# Altium PCB MASTER.PcbDoc
Units mm, origin at the board's own origin, x right, y up, seen from the top; angles counter-clockwise.
Board outline 101.16 x 95.25 mm, 2 copper layers (Top Layer, Bottom Layer); 53 components, 59 nets, 313 pads, 97 vias.
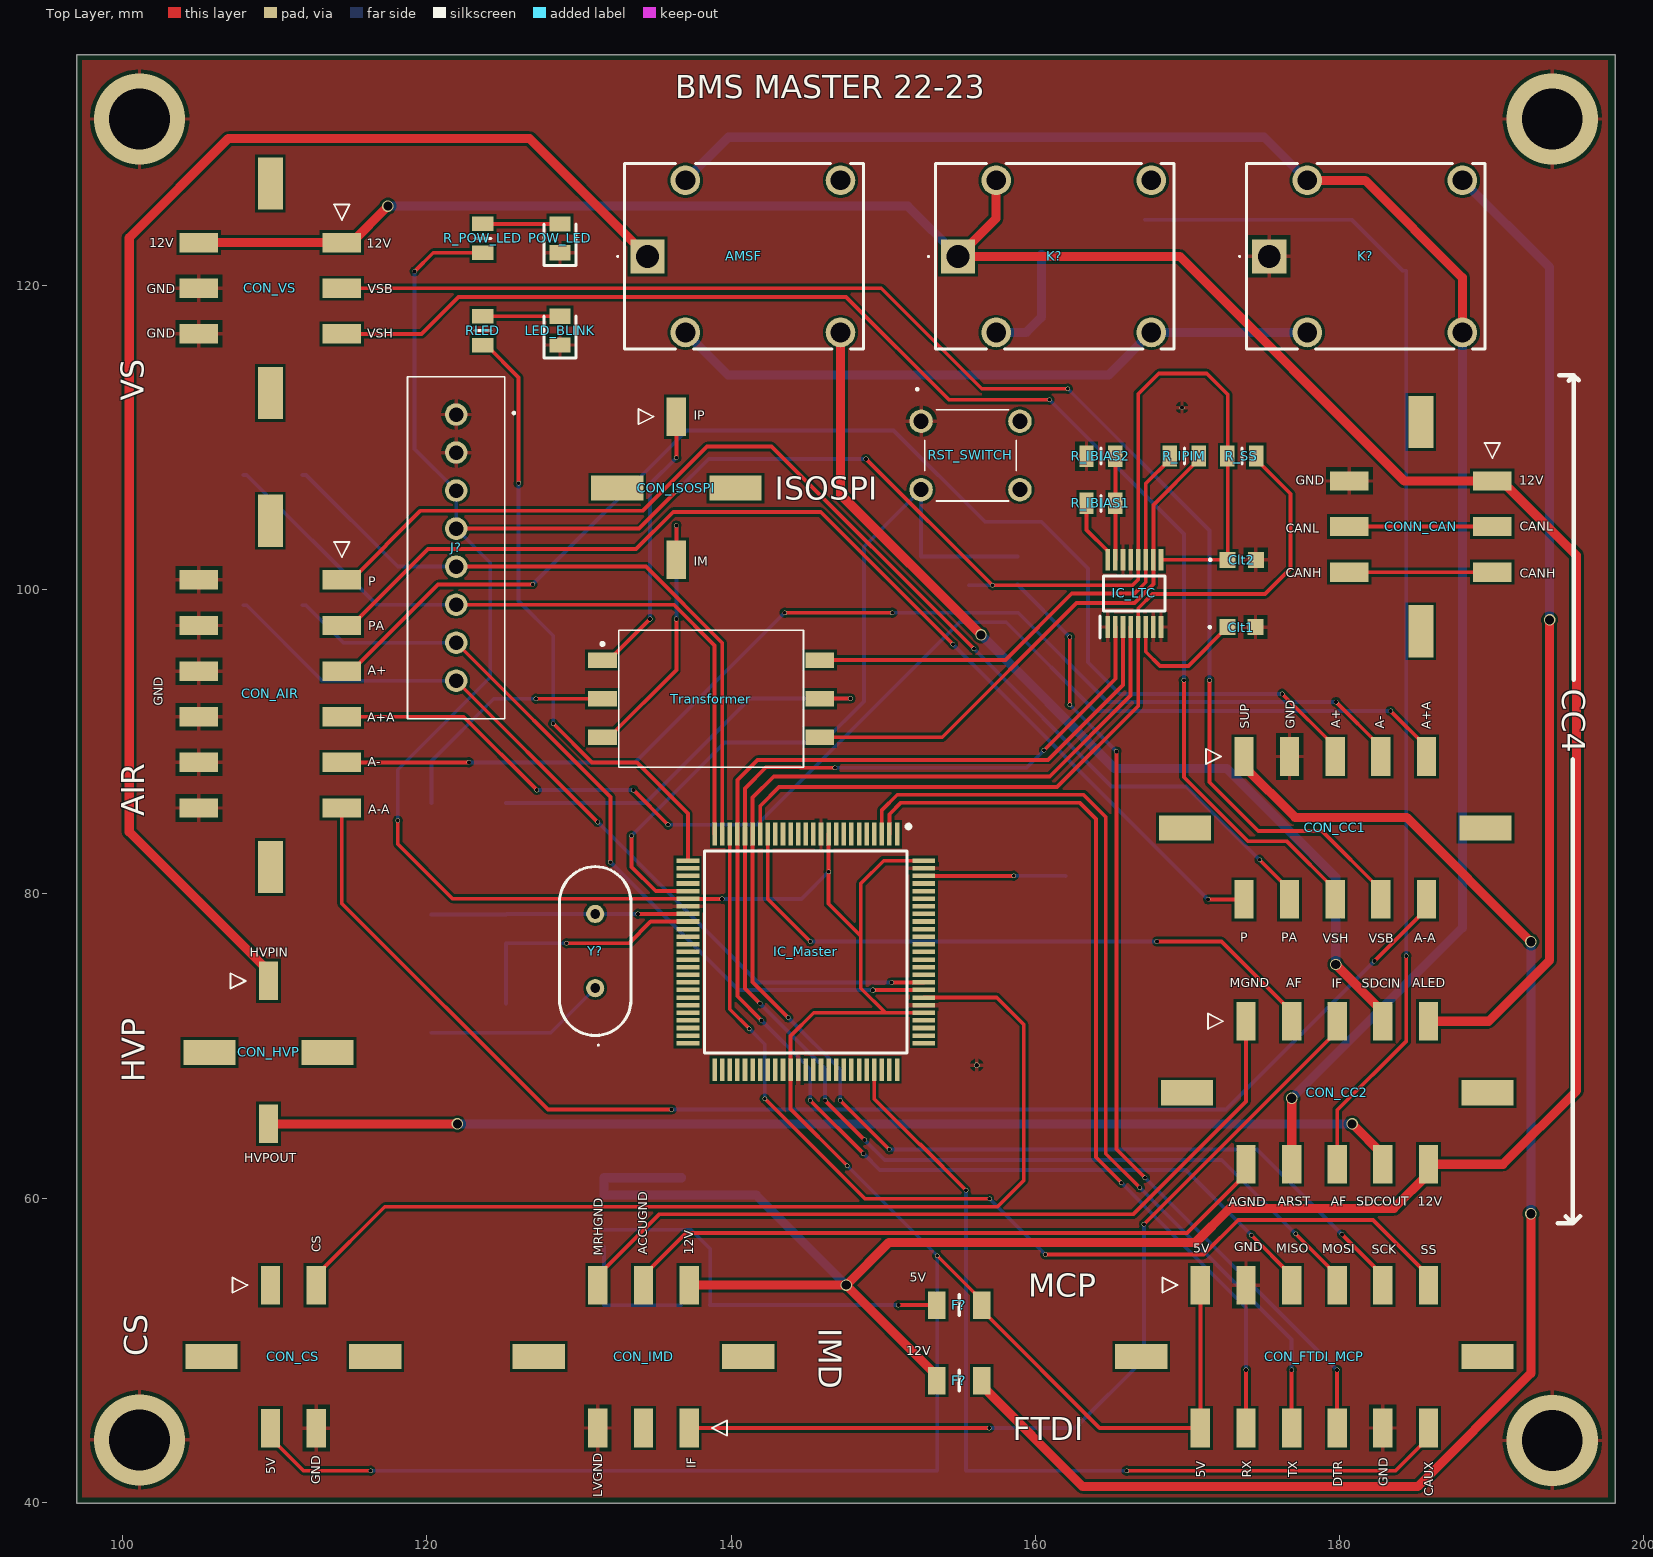
[diagram p0: Top Layer view]
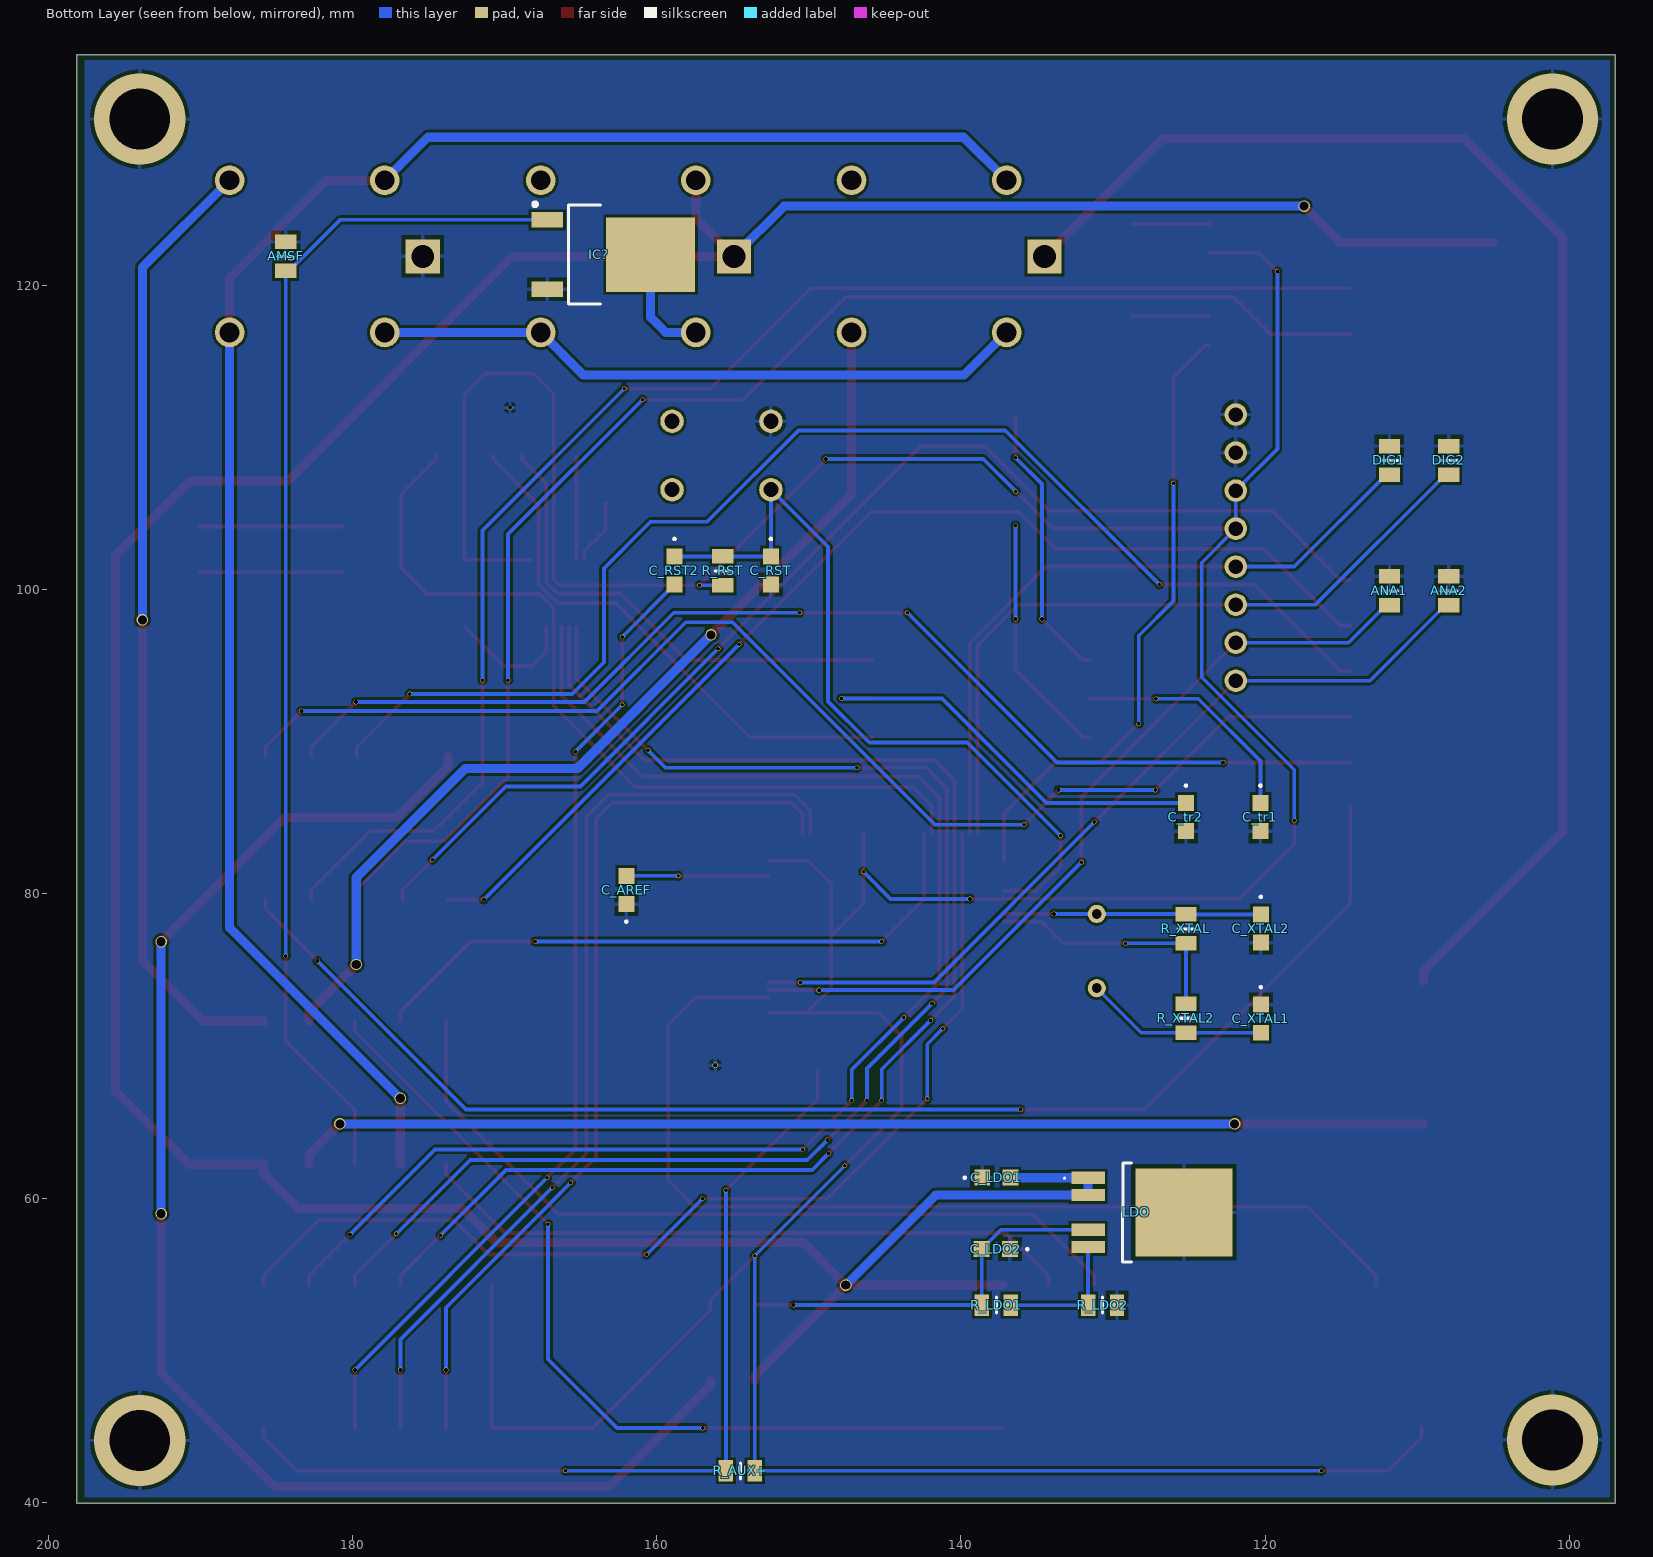
[diagram p1: Bottom Layer view, seen from below]
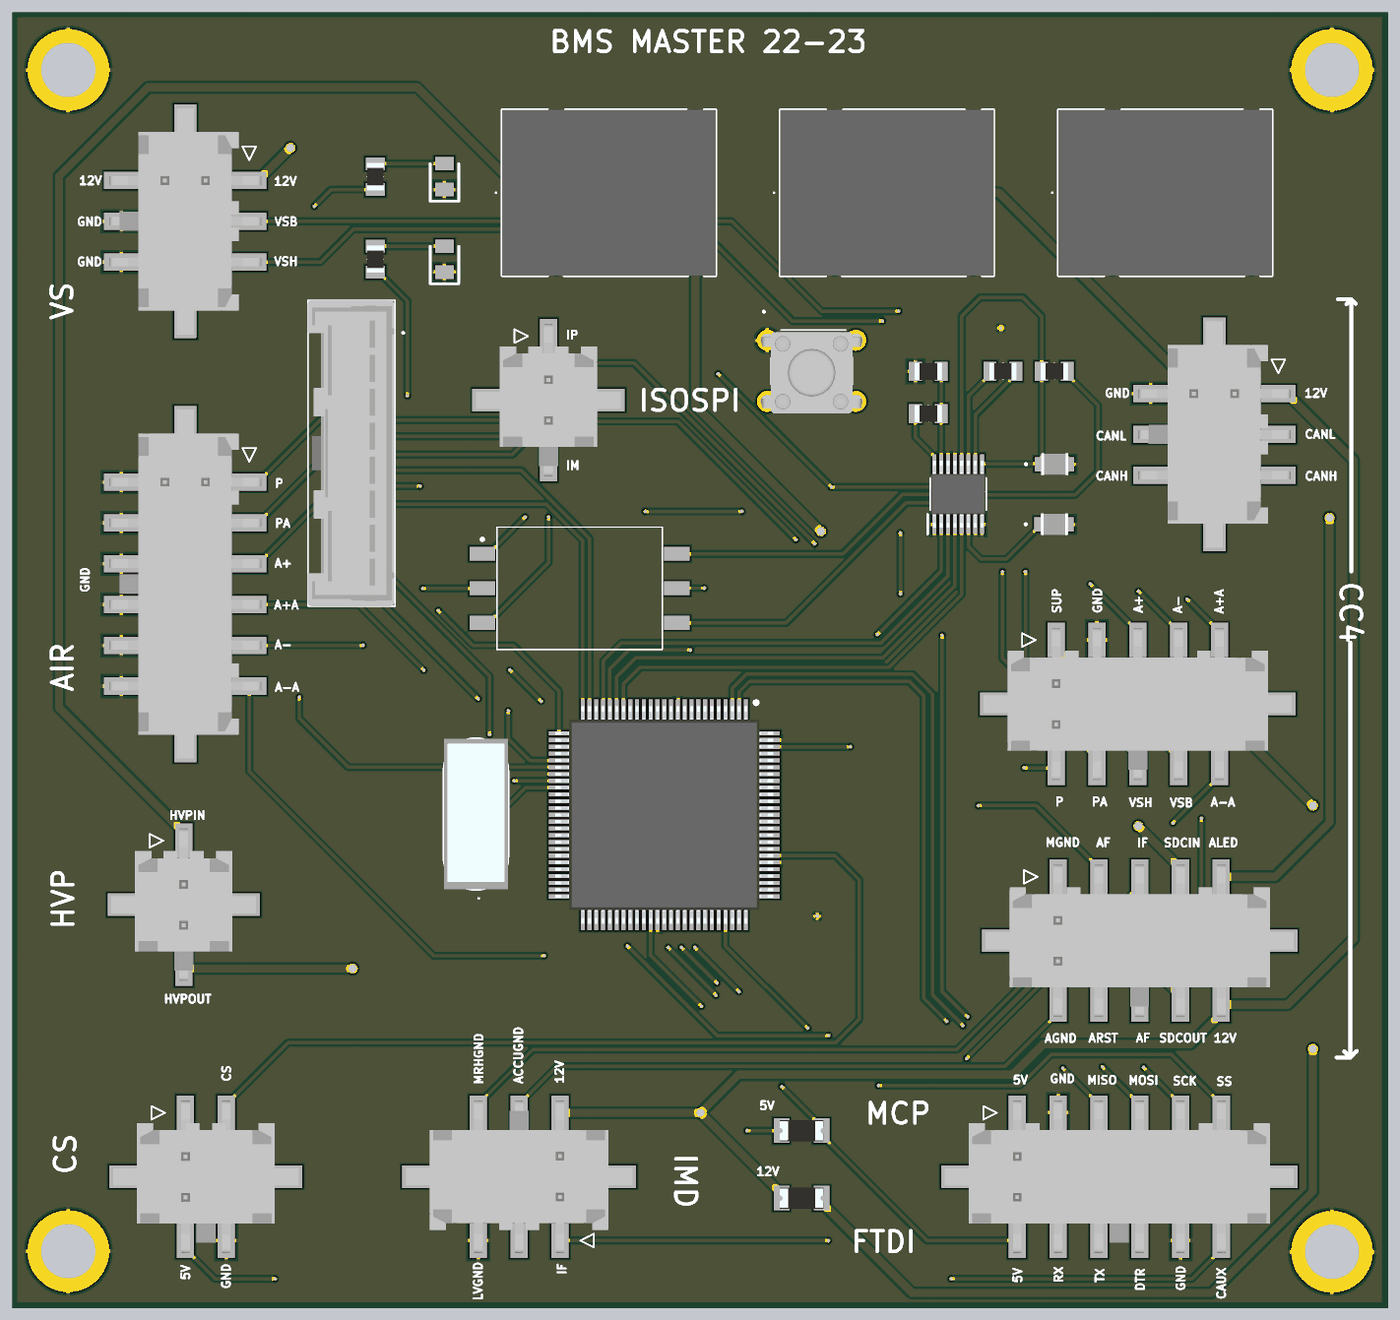
[diagram p2: 3D render of the assembled board from above, using the file's embedded part models]
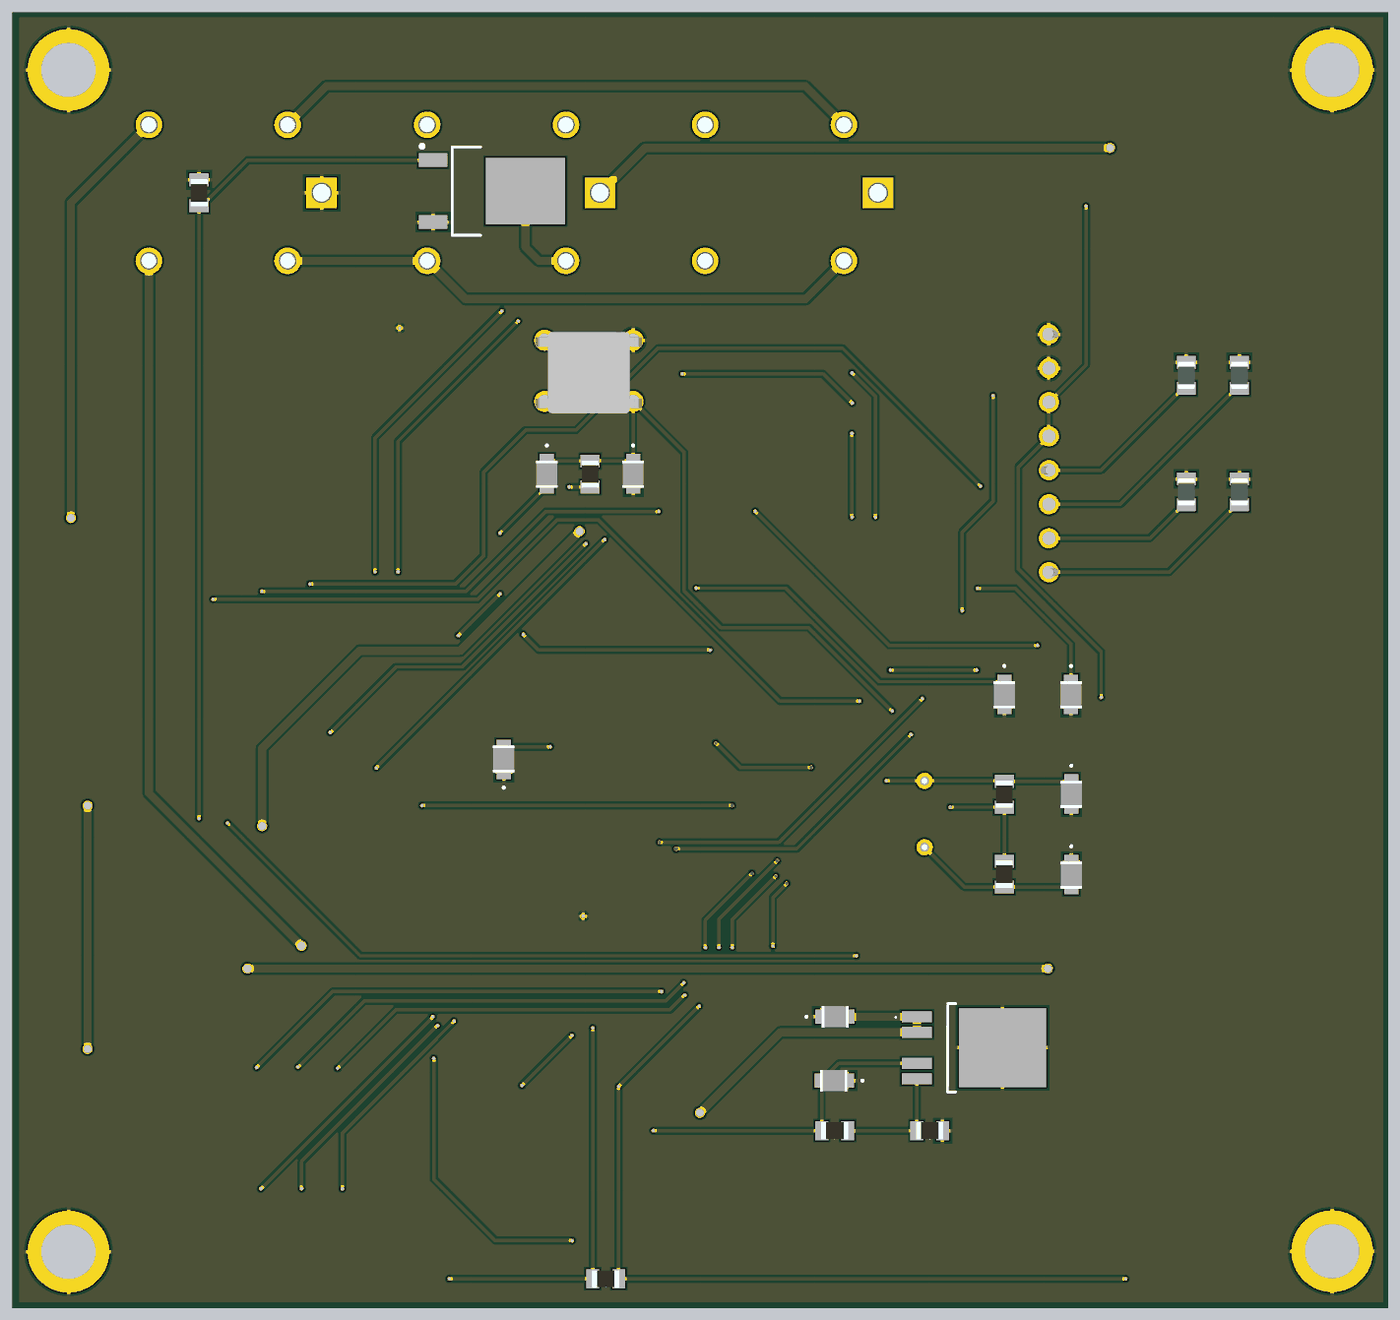
[diagram p3: 3D render of the assembled board from below, using the file's embedded part models]

## Layer stack, top to bottom
Top Solder: solder mask 0.0102, Solder Resist, Dk 3.5
Top Layer: signal copper 0.0356
Dielectric 1: dielectric 0.32, FR-4, Dk 4.8
Bottom Layer: signal copper 0.0356
Bottom Solder: solder mask 0.0102, Solder Resist, Dk 3.5

## Board outline
96.975,39.925 198.131,39.925 198.131,135.175 96.975,135.175

## Design rules (kind name [scope] priority, off if disabled: settings)
Clearance [All] p1: gap=0.17 ignorepadtopadclearanceinfootprint=FALSE
PolygonConnect [All] p1: connectstyle=Relief reliefconductorwidth=0.254 reliefentries=4 polygonreliefangle="90 Angle" airgapwidth=0.254
RoutingVias [All] p1: holewidth=0.25 width=0.3 viastyle="Through Hole" minholewidth=0.25 minwidth=0.3 maxholewidth=0.25 maxwidth=0.3
SolderMaskExpansion [All] p1: expansion=0.102 istentingtop=FALSE
Width [All] p1: maxlimit=0.6 minlimit=0.25 preferedwidth=0.25 minimp=50.000000 maximp=50.000000 favimp=50.000000
30 further rules are at their usual default settings.

## Classes and differential pairs
component class MASTER: AMSF ANA1 ANA2 C_AREF C_LDO1 C_LDO2 C_RST C_RST2 C_tr1 C_tr2 C_XTAL1 C_XTAL2 Clt1 Clt2 CON_AIR CON_CC1 CON_CC2 CON_CS CON_FTDI_MCP CON_HVP CON_IMD CON_ISOSPI CON_VS CONN_CAN DIG1 DIG2 F? IC? IC_LTC IC_Master J? K? LDO LED_BLINK POW_LED R_AUX+ R_IBIAS1 R_IBIAS2 R_IPIM R_LDO1 R_LDO2 R_POW_LED R_RST R_SS R_XTAL R_XTAL2 RLED RST_SWITCH Transformer Y?

## Components (designator, comment, footprint, x,y, rotation, side; value= is the part's Value field where it differs from the comment)
AMSF "10k" RESC2012X60N 184.398,121.92 r270 bottom
AMSF "SCA20-20-12VDC-C" SCA202012VDCC 134.493,121.92 r180 top
ANA1 "10K" RESC2012X60N 111.82,99.93 r270 bottom
ANA2 "10K" RESC2012X60N 107.92,99.93 r270 bottom
C_AREF "10nF" C2012_Commercial 161.996,80.257 r90 bottom
C_LDO1 "10nF" C2012_Commercial 137.668,61.341 r180 bottom
C_LDO2 "10nF" C2012_Commercial 137.704,56.642 r0 bottom
C_RST "22pF" C2012_Commercial 152.49,101.265 r270 bottom
C_RST2 "10uF" C2012_Commercial 158.83,101.265 r270 bottom
C_tr1 "0.01uF" C2012_Commercial 120.3,85.05 r270 bottom
C_tr2 "0.01uF" C2012_Commercial 125.2,85.05 r270 bottom
C_XTAL1 "22pF" C2012_Commercial 120.275,71.795 r270 bottom
C_XTAL2 "22pF" C2012_Commercial 120.275,77.725 r270 bottom
Clt1 "0.01uF" C2012_Commercial 173.552,97.542 r0 top
Clt2 "0.01uF" C2012_Commercial 173.577,101.967 r0 top
CON_AIR "43045-1219" 43045-12YY_181920 109.7,93.15 r90 top
CON_CC1 "43045-1019" 43045-10YY_181920 179.718,84.338 r180 top
CON_CC2 "43045-1019" 43045-10YY_181920 179.853,66.928 r180 top
CON_CS "43045-0419" 43045-04YY_181920 111.21,49.575 r180 top
CON_FTDI_MCP "43045-1219" 43045-12YY_181920 178.356,49.578 r180 top
CON_HVP "43045-0218" 43045-02YY_181920 109.585,69.58 r180 top
CON_IMD "43045-0619" 43045-06YY_181920 134.239,49.578 r0 top
CON_ISOSPI "43045-0218" 43045-02YY_181920 136.398,106.681 r180 top
CON_VS "43045-0619" 43045-06YY_181920 109.7,119.825 r90 top
CONN_CAN "43045-0619" 43045-06YY_181920 185.349,104.153 r90 top
DIG1 "10K" RESC2012X60N 111.82,108.5 r270 bottom
DIG2 "10K" RESC2012X60N 107.92,108.5 r270 bottom
F? "NANOSMDC020F-2" NANOSMDC016F2 155,52.96 r0 top
F? "NANOSMDC020F-2" NANOSMDC016F2 155,48 r0 top
IC? "STD10NF10T4" TO228P972X240-3N 162.849,122.043 r180 bottom
IC_LTC "LTC6820IMS#PBF" SOP50P490X110-16N 166.517,99.764 r90 top
IC_Master "ATMEGA2560-16AU" QFP50P1600X1600X120-100N 144.91,76.184 r270 top
J? "2132415-8" 21324158 121.92,102.77 r90 top
K? "SCA20-20-12VDC-C" SCA202012VDCC 175.384,121.92 r180 top
K? "SCA20-20-12VDC-C" SCA202012VDCC 154.926,121.92 r180 top
LDO "TLF1963TEATMA1" TLF1963TEATMA1 127.381,59.055 r270 bottom
LED_BLINK "SML-LXT0805IW-TR" LEDC2012X80N 128.751,117.039 r90 top
POW_LED "SML-LXT0805IW-TR" LEDC2012X80N 128.751,123.106 r90 top
R_AUX+ "10k" RESC2012X60N 154.5,42.07 r180 bottom
R_IBIAS1 "2.8K" RESC2012X60N 164.317,105.682 r0 top
R_IBIAS2 "1.2K" RESC2012X60N 164.317,108.782 r0 top
R_IPIM "1K" RESC2012X60N 169.802,108.792 r0 top
R_LDO1 "3.3K" RESC2012X60N 137.668,52.959 r0 bottom
R_LDO2 "10K" RESC2012X60N 130.683,52.959 r0 bottom
R_POW_LED "1K" RESC2012X60N 123.671,123.106 r90 top
R_RST "10k" RESC2012X60N 155.65,101.241 r270 bottom
R_SS "10K" RESC2012X60N 173.577,108.792 r180 top
R_XTAL "10M" RESC2012X60N 125.2,77.7 r270 bottom
R_XTAL2 "27" RESC2012X60N 125.2,71.825 r90 bottom
RLED "1K" RESC2012X60N 123.671,117.039 r90 top
RST_SWITCH "1825910-3" 18259103 152.49,111.08 r90 top
Transformer "HM2113ZNL" HM2113ZNL 138.684,92.837 r270 top
Y? "LFXTAL003169" LFXTAL003169 131.064,73.801 r90 top

## Footprints (in the part's own frame and the unit in brackets; to place one, negate y for a bottom-side part, rotate by r counter-clockwise, add the part's x,y. Pads: shape width x height; smd on the part's side, far side on the other; paste and mask are expansions set on the pad)
43045-02YY_181920 [mm]
  rect 1.27x2.54 smd: 1(0,-4.7) 2(0,4.7)
  rect 3.43x1.65 smd: 3(3.885,0) 4(-3.885,0)
  silkscreen extent 1.5,-5.2 2.5,-4.2, body extent -5.33,-5.6 5.33,5.6, height 9.96
43045-04YY_181920 [mm]
  rect 1.27x2.54 smd: 1(1.5,-4.7) 2(-1.5,-4.7) 3(1.5,4.7) 4(-1.5,4.7)
  rect 3.43x1.65 smd: 5(5.385,0) 6(-5.385,0)
  silkscreen extent 3,-5.2 4,-4.2, body extent -6.83,-5.6 6.83,5.6, height 9.96
43045-06YY_181920 [mm]
  rect 1.27x2.54 smd: 1(3,-4.7) 2(0,-4.7) 3(-3,-4.7) 4(3,4.7) 5(0,4.7) 6(-3,4.7)
  rect 3.43x1.65 smd: 7(6.885,0) 8(-6.885,0)
  silkscreen extent 4.5,-5.2 5.5,-4.2, body extent -8.32,-5.6 8.32,5.6, height 9.96
43045-10YY_181920 [mm]
  rect 1.27x2.54 smd: 1(6,-4.7) 2(3,-4.7) 3(0,-4.7) 4(-3,-4.7) 5(-6,-4.7) 6(6,4.7) 7(3,4.7) 8(0,4.7) 9(-3,4.7) 10(-6,4.7)
  rect 3.43x1.65 smd: 11(9.885,0) 12(-9.885,0)
  silkscreen extent 7.5,-5.2 8.5,-4.2, body extent -11.32,-5.6 11.32,5.6, height 9.96
43045-12YY_181920 [mm]
  rect 1.27x2.54 smd: 1(7.5,-4.7) 2(4.5,-4.7) 3(1.5,-4.7) 4(-1.5,-4.7) 5(-4.5,-4.7) 6(-7.5,-4.7) 7(7.5,4.7) 8(4.5,4.7) 9(1.5,4.7) 10(-1.5,4.7) 11(-4.5,4.7) 12(-7.5,4.7)
  rect 3.43x1.65 smd: 13(11.385,0) 14(-11.385,0)
  silkscreen extent 9,-5.2 10,-4.2, body extent -12.83,-5.6 12.83,5.6, height 9.95
18259103 [mm]
  round 1.54 hole 0.99: 1(0,0) 2(0,-6.5) 3(-4.5,0) 4(-4.5,-6.5)
  silkscreen extent -5.25,-6.25 2.15,0.3, body extent -5.39,-7.15 0.61,0.65, height 3.32
21324158 [mm]
  round 1.478 hole 0.95: 1(8.75,0) 2(6.25,0) 3(3.75,0) 4(1.25,0) 5(-1.25,0) 6(-3.75,0) 7(-6.25,0) 8(-8.75,0)
  silkscreen extent -11.25,-3.85 11.25,3.2, body extent -11.25,-3.16 11.25,3.24, height 8.82
C2012_Commercial [mm]
  rect 1.05x1.05 smd: 1(-0.925,0) 2(0.925,0)
  silkscreen extent -2.12,-0.05 -2.03,0.05, body extent -0.96,-0.8 1.04,0.8, height 1.25
HM2113ZNL [mm]
  rect 1.02x1.89 smd: 1(-2.54,-7.145) 2(0,-7.145) 3(2.54,-7.145) 4(2.54,7.145) 5(0,7.145) 6(-2.54,7.145)
  silkscreen extent -4.5,-7.24 4.5,6.08
LEDC2012X80N [mm]
  rect 1x1.4 smd: 1(-0.95,0) 2(0.95,0)
  silkscreen extent -1.8,-1.05 0.95,1.05
LFXTAL003169 [mm]
  round 1.192 hole 0.65: 1(0,0) 2(4.88,0)
  silkscreen extent -3.8,-2.35 7.99,2.35, body extent -3.09,-2.35 7.97,2.35, height 4.1
NANOSMDC016F2 [mm]
  rect 1.16x1.81 smd: 1(-1.475,0) 2(1.475,0)
  silkscreen extent 0,-0.69 0,0.69, body extent -1.6,-0.79 1.6,0.79, height 0.82
QFP50P1600X1600X120-100N [mm]
  rect 1.5x0.3 smd: 1(-7.75,6) 2(-7.75,5.5) 3(-7.75,5) 4(-7.75,4.5) 5(-7.75,4) 6(-7.75,3.5) 7(-7.75,3) 8(-7.75,2.5) 9(-7.75,2) 10(-7.75,1.5) 11(-7.75,1) 12(-7.75,0.5) 13(-7.75,0) 14(-7.75,-0.5) 15(-7.75,-1) 16(-7.75,-1.5) 17(-7.75,-2) 18(-7.75,-2.5) 19(-7.75,-3) 20(-7.75,-3.5) 21(-7.75,-4) 22(-7.75,-4.5) 23(-7.75,-5) 24(-7.75,-5.5) 25(-7.75,-6) 51(7.75,-6) 52(7.75,-5.5) 53(7.75,-5) 54(7.75,-4.5) 55(7.75,-4) 56(7.75,-3.5) 57(7.75,-3) 58(7.75,-2.5) 59(7.75,-2) 60(7.75,-1.5) 61(7.75,-1) 62(7.75,-0.5) 63(7.75,0) 64(7.75,0.5) 65(7.75,1) 66(7.75,1.5) 67(7.75,2) 68(7.75,2.5) 69(7.75,3) 70(7.75,3.5) 71(7.75,4) 72(7.75,4.5) 73(7.75,5) 74(7.75,5.5) 75(7.75,6)
  rect 0.3x1.5 smd: 26(-6,-7.75) 27(-5.5,-7.75) 28(-5,-7.75) 29(-4.5,-7.75) 30(-4,-7.75) 31(-3.5,-7.75) 32(-3,-7.75) 33(-2.5,-7.75) 34(-2,-7.75) 35(-1.5,-7.75) 36(-1,-7.75) 37(-0.5,-7.75) 38(0,-7.75) 39(0.5,-7.75) 40(1,-7.75) 41(1.5,-7.75) 42(2,-7.75) 43(2.5,-7.75) 44(3,-7.75) 45(3.5,-7.75) 46(4,-7.75) 47(4.5,-7.75) 48(5,-7.75) 49(5.5,-7.75) 50(6,-7.75) 76(6,7.75) 77(5.5,7.75) 78(5,7.75) 79(4.5,7.75) 80(4,7.75) 81(3.5,7.75) 82(3,7.75) 83(2.5,7.75) 84(2,7.75) 85(1.5,7.75) 86(1,7.75) 87(0.5,7.75) 88(0,7.75) 89(-0.5,7.75) 90(-1,7.75) 91(-1.5,7.75) 92(-2,7.75) 93(-2.5,7.75) 94(-3,7.75) 95(-3.5,7.75) 96(-4,7.75) 97(-4.5,7.75) 98(-5,7.75) 99(-5.5,7.75) 100(-6,7.75)
  silkscreen extent -8.37,-6.65 6.65,6.88, body extent -8,-8 8,8, height 1.2
RESC2012X60N [mm]
  rect 0.95x1.4 smd: 1(-0.95,0) 2(0.95,0)
  silkscreen extent 0,-0.53 0,0.53, body extent -1,-0.63 1,0.63, height 0.6
SCA202012VDCC [mm]
  rect 2.25x2.25 hole 1.5: 1(0,0)
  round 1.95 hole 1.3: 2(-2.5,5) 3(-12.7,5) 4(-12.7,-5) 5(-2.5,-5)
  silkscreen extent -14.2,-6.1 2,6.1, body extent -14.2,-6.1 1.5,6.1, height 13.8
SOP50P490X110-16N [mm]
  rect 1.425x0.3 smd: 1(-2.212,1.75) 2(-2.212,1.25) 3(-2.212,0.75) 4(-2.212,0.25) 5(-2.212,-0.25) 6(-2.212,-0.75) 7(-2.212,-1.25) 8(-2.212,-1.75) 9(2.212,-1.75) 10(2.212,-1.25) 11(2.212,-0.75) 12(2.212,-0.25) 13(2.212,0.25) 14(2.212,0.75) 15(2.212,1.25) 16(2.212,1.75)
  silkscreen extent -2.93,-2.02 1.15,2.25, body extent -2.45,-2.02 2.45,2.02, height 1.1
TLF1963TEATMA1 [mm]
  rect 0.8x2.2 smd: 1(-2.28,-4.25) 2(-1.14,-4.25) 4(1.14,-4.25) 5(2.28,-4.25)
  rect 5.8x6.4 smd: 3(0,2.05)
  silkscreen extent -3.25,-5.85 3.25,-1.4
TO228P972X240-3N [mm]
  rect 2.1x1 smd: 1(-4.35,2.28) 3(-4.35,-2.28)
  rect 5.85x4.9 smd: 4(2.45,0)
  silkscreen extent -5.28,-3.25 -0.85,3.42

## Part data
AMSF R_AUX+ R_IBIAS1 R_IBIAS2 R_IPIM R_LDO1 R_LDO2 R_POW_LED R_RST R_SS R_XTAL R_XTAL2 RLED: library part RC0805JR-0710KL, "Resistor", Manufacturer_Name=KEMET, Mouser Part Number=603-RC0805JR-0710KL, Arrow Part Number=RC0805JR-0710KL, Arrow Price/Stock=https://www.arrow.com/en/products/rc0805jr-0710kl/yageo, Height=0.6mm, Manufacturer_Part_Number=RC0805JR-0710KL, Mouser Price/Stock=https://www.mouser.co.uk/ProductDetail/YAGEO/RC0805JR-0710KL?qs=ZFGQJeMQzF5q%2Fp77vM%2FrVQ%3D%3D
  AMSF R_SS: Datasheet Link=http://www.yageo.com/documents/recent/PYu-RC_Group_51_RoHS_L_10.pdf
  R_AUX+ R_IBIAS1 R_IBIAS2 R_IPIM R_LDO1 R_LDO2 R_POW_LED R_RST R_XTAL R_XTAL2 RLED: Datasheet Link=https://datasheet.datasheetarchive.com/originals/distributors/Datasheets_SAMA/902f9e387b938f871d31120f5fc1d65e.pdf
AMSF K? K?: "Relay or Contactor", Manufacturer_Name=LEONE, Datasheet Link=https://www.kuraelectronics.com/new-pdf/SCA%2020.pdf, Height=13.7mm, Manufacturer_Part_Number=SCA20-20-12VDC-C
ANA1 ANA2 DIG1 DIG2: library part RC0805JR-0710KL, "Resistor", Manufacturer_Name=YAGEO, Mouser Part Number=603-RC0805JR-0710KL, Arrow Part Number=RC0805JR-0710KL, Arrow Price/Stock=https://www.arrow.com/en/products/rc0805jr-0710kl/yageo?region=nac, Datasheet Link=https://componentsearchengine.com/Datasheets/2/RC0805JR-0710KL.pdf, Height=0.6mm, Manufacturer_Part_Number=RC0805JR-0710KL, Mouser Price/Stock=https://www.mouser.co.uk/ProductDetail/YAGEO/RC0805JR-0710KL?qs=ZFGQJeMQzF5q%2Fp77vM%2FrVQ%3D%3D
C_AREF C_LDO1 C_LDO2 C_RST C_RST2 C_tr1 C_tr2 C_XTAL1 C_XTAL2 Clt1 Clt2: library part C2012C0G1E333J125AA, "Capacitor", Manufacturer_Name=TDK, Mouser Part Number=810-C2012C0G1E333J, Arrow Part Number=C2012C0G1E333J125AA, Arrow Price/Stock=https://www.arrow.com/en/products/c2012c0g1e333j125aa/tdk, Datasheet Link=https://product.tdk.com/system/files/dam/doc/product/capacitor/ceramic/mlcc/catalog/mlcc_commercial_general_en.pdf, Height=0.75mm, Manufacturer_Part_Number=C2012C0G1E333J125AA, Mouser Price/Stock=https://www.mouser.co.uk/ProductDetail/TDK/C2012C0G1E333J125AA?qs=NRhsANhppD9YN6415mAquQ%3D%3D
CON_AIR CON_FTDI_MCP: "Connector", Manufacturer_Name=Molex, Mouser Part Number=538-43045-1219, Datasheet Link=https://www.molex.com/pdm_docs/sd/430450218_sd.pdf, Height=9.91mm, Manufacturer_Part_Number=43045-1219, Mouser Price/Stock=https://www.mouser.co.uk/ProductDetail/Molex/43045-1219?qs=359VwiUTsp3iCU2NVYxNVg%3D%3D
CON_CC1 CON_CC2: "Connector", Manufacturer_Name=Molex, Mouser Part Number=538-43045-1019, Arrow Part Number=43045-1019, Arrow Price/Stock=https://www.arrow.com/en/products/43045-1019/molex?region=nac, Datasheet Link=https://www.molex.com/pdm_docs/sd/430450218_sd.pdf, Height=9.91mm, Manufacturer_Part_Number=43045-1019, Mouser Price/Stock=https://www.mouser.co.uk/ProductDetail/Molex/43045-1019?qs=OWQJ9aScCGICje0BO%252BCnwQ%3D%3D
CON_CS: "Connector", Manufacturer_Name=Molex, Mouser Part Number=538-43045-0419, Datasheet Link=https://www.molex.com/pdm_docs/sd/430450218_sd.pdf, Height=9.91mm, Manufacturer_Part_Number=43045-0419, Mouser Price/Stock=https://www.mouser.co.uk/ProductDetail/Molex/43045-0419?qs=UeCeOHRHQebVNIQyI9VWWg%3D%3D
CON_HVP CON_ISOSPI: "Connector", Manufacturer_Name=Molex, Mouser Part Number=538-43045-0218, Arrow Part Number=43045-0218, Arrow Price/Stock=https://www.arrow.com/en/products/43045-0218/molex, Datasheet Link=https://www.molex.com/pdm_docs/sd/430450218_sd.pdf, Height=9.91mm, Manufacturer_Part_Number=43045-0218, Mouser Price/Stock=https://www.mouser.co.uk/ProductDetail/Molex/43045-0218?qs=4XSMV6Twtb2qUKINalLbdA%3D%3D
CON_IMD CON_VS CONN_CAN: "Connector", Manufacturer_Name=Molex, Mouser Part Number=538-43045-0619, Arrow Part Number=43045-0619, Arrow Price/Stock=https://www.arrow.com/en/products/43045-0619/molex, Datasheet Link=https://www.molex.com/pdm_docs/sd/430450218_sd.pdf, Height=9.91mm, Manufacturer_Part_Number=43045-0619, Mouser Price/Stock=https://www.mouser.co.uk/ProductDetail/Molex/43045-0619?qs=KC2ywxza1kr7EVu5MuTw7g%3D%3D
F? F?: "Resettable Fuse", Manufacturer_Name=LITTELFUSE, Mouser Part Number=650-NANOSMDC020F-2, Arrow Part Number=NANOSMDC020F-2, Arrow Price/Stock=https://www.arrow.com/en/products/nanosmdc020f-2/littelfuse, Datasheet Link=https://www.littelfuse.com/~/media/electronics/datasheets/resettable_ptcs/littelfuse_ptc_nanosmdc_datasheet.pdf.pdf, Height=1mm, Manufacturer_Part_Number=NANOSMDC020F-2, Mouser Price/Stock=https://www.mouser.co.uk/ProductDetail/Littelfuse/NANOSMDC020F-2?qs=iK0evp%252BCRRU6agwMt7HYjg%3D%3D
IC?: "Integrated Circuit", Manufacturer_Name=STMicroelectronics, Mouser Part Number=511-STD10NF10, Arrow Part Number=STD10NF10T4, Arrow Price/Stock=https://www.arrow.com/en/products/std10nf10t4/stmicroelectronics, Datasheet Link=http://www.st.com/web/en/resource/technical/document/datasheet/CD00002133.pdf, Height=2.4mm, Manufacturer_Part_Number=STD10NF10T4, Mouser Price/Stock=https://www.mouser.co.uk/ProductDetail/STMicroelectronics/STD10NF10T4?qs=El1T93pd01%2FBh%252BX9NfIsIQ%3D%3D
IC_LTC: "Integrated Circuit", Manufacturer_Name="Analog Devices", Mouser Part Number=584-LTC6820IMS#PBF, Arrow Part Number=LTC6820IMS#PBF, Arrow Price/Stock=https://www.arrow.com/en/products/ltc6820imspbf/linear-technology, Datasheet Link=https://datasheet.datasheetarchive.com/originals/distributors/Datasheets-SFU1/DSASFU10008504.pdf, Height=1.1mm, Manufacturer_Part_Number=LTC6820IMS#PBF, Mouser Price/Stock=https://www.mouser.co.uk/ProductDetail/Analog-Devices/LTC6820IMSPBF?qs=hVkxg5c3xu9mQWZApkXW1Q%3D%3D
IC_Master: "Integrated Circuit", Manufacturer_Name=Microchip, Mouser Part Number=556-ATMEGA2560-16AU, Arrow Part Number=ATMEGA2560-16AU, Arrow Price/Stock=https://www.arrow.com/en/products/atmega2560-16au/microchip-technology?region=nac, Datasheet Link=https://datasheet.datasheetarchive.com/originals/distributors/Datasheets_SAMA/4a5a397fa76c39b5297f4121ace1d84e.pdf, Height=1.2mm, Manufacturer_Part_Number=ATMEGA2560-16AU, Mouser Price/Stock=https://www.mouser.co.uk/ProductDetail/Microchip-Technology-Atmel/ATMEGA2560-16AU?qs=aqrrBurbvGciYmlAokFS0w%3D%3D
J?: "Connector", Manufacturer_Name="TE Connectivity", Mouser Part Number=571-2132415-8, Arrow Part Number=2132415-8, Arrow Price/Stock=https://www.arrow.com/en/products/2132415-8/te-connectivity?region=nac, Datasheet Link=https://componentsearchengine.com/Datasheets/2/2132415-8.pdf, Height=8.93mm, Manufacturer_Part_Number=2132415-8, Mouser Price/Stock=https://www.mouser.co.uk/ProductDetail/TE-Connectivity/2132415-8?qs=XhI5AayaxxU5%2FK%252BXTeVEJQ%3D%3D
LDO: "Integrated Circuit", Manufacturer_Name=Infineon, Mouser Part Number=726-TLF1963TEATMA1, Arrow Part Number=TLF1963TEATMA1, Arrow Price/Stock=https://www.arrow.com/en/products/tlf1963teatma1/infineon-technologies-ag?region=nac, Datasheet Link=https://www.infineon.com/dgdl/Infineon-TLF1963-DS-v01_00-EN.pdf?fileId=5546d46258fc0bc1015969d2981941e0, Height=2.35mm, Manufacturer_Part_Number=TLF1963TEATMA1, Mouser Price/Stock=https://www.mouser.co.uk/ProductDetail/Infineon-Technologies/TLF1963TEATMA1?qs=SiyfpgnvCZluIGE%2FbZiglw%3D%3D
LED_BLINK POW_LED: "LED", Manufacturer_Name=Lumex, Mouser Part Number=696-SML-LXT0805IW, Arrow Part Number=SML-LXT0805IW-TR, Arrow Price/Stock=https://www.arrow.com/en/products/sml-lxt0805iw-tr/lumex, Datasheet Link=http://uk.rs-online.com/web/p/products/8886313, Height=0.8mm, Manufacturer_Part_Number=SML-LXT0805IW-TR, Mouser Price/Stock=https://www.mouser.co.uk/ProductDetail/Lumex/SML-LXT0805IW-TR?qs=9HInCHf8eFgASaxWaq368w%3D%3D
RST_SWITCH: "Switch", Manufacturer_Name="TE Connectivity", Mouser Part Number=N/A, Arrow Part Number=1825910-3, Arrow Price/Stock=https://www.arrow.com/en/products/1825910-3/te-connectivity?region=nac, Datasheet Link=http://uk.rs-online.com/web/p/products/4791407, Height=4.3mm, Manufacturer_Part_Number=1825910-3, Mouser Price/Stock=https://www.mouser.co.uk/ProductDetail/TE-Connectivity/1825910-3?qs=bdENzIhz2rnPyBgKfIxERA%3D%3D
Transformer: "Transformer", Manufacturer_Name=Pulse, Mouser Part Number=673-HM2113ZNL, Arrow Part Number=HM2113ZNL, Arrow Price/Stock=https://www.arrow.com/en/products/hm2113znl/pulse-electronics-corporation?region=nac, Datasheet Link=https://www.mouser.com/datasheet/2/336/HM2113ZNL-1224943.pdf, Height=3.45mm, Manufacturer_Part_Number=HM2113ZNL, Mouser Price/Stock=https://www.mouser.co.uk/ProductDetail/Pulse-Electronics/HM2113ZNL?qs=chTDxNqvsykAwD5fAZXknQ%3D%3D
Y?: "Crystal or Oscillator", Manufacturer_Name=IQD, Datasheet Link=https://componentsearchengine.com/Datasheets/2/LFXTAL003169.pdf, Height=4.1mm, Manufacturer_Part_Number=LFXTAL003169

## Via types
v1: diameter 0.3, hole 0.25, Top Layer to Bottom Layer, 81 vias
v2: diameter 0.75, hole 0.6, Top Layer to Bottom Layer, 10 vias
v3: diameter 6, hole 4, Top Layer to Bottom Layer, 4 vias
v4: diameter 0.35, hole 0.3, Top Layer to Bottom Layer, 2 vias

## Nets (pads, with @x,y where several pads share a name; then routed paths per layer and width w, separated by ;. In a path a pad name is that pad's centre, name@x,y a point inside that pad or via, vN(x,y) a via of type N, cw(c..) or ccw(c..) an arc to the next point about the centre after c; other vN are vias at no path point)
5V: C_LDO2.2 F?.1@153.525,52.96 LDO.4 R_LDO1.2 | length 26.1
  Top Layer w0.25: v1(151,52.96) F?.1@153.525,52.96
  Bottom Layer w0.25: LDO.4 137.356,57.915 C_LDO2.2 138.629,52.97 R_LDO1.2 ; R_LDO1.2 R_LDO1.2 ; v1(151,52.96) R_LDO1.2
+5: Clt2.1 CON_CS.3 CON_FTDI_MCP.1 CON_FTDI_MCP.7 F?.2@156.475,52.96 IC_LTC.9 IC_LTC.12 IC_Master.10 IC_Master.31 IC_Master.61 IC_Master.80 IC_Master.100 J?.3 J?.4 R_AUX+.2 R_POW_LED.1 R_RST.2 R_SS.2 | length 304.8
  Top Layer w0.25: CON_CS.3 109.71,44.24 111.87,42.08 111.88,42.07 v1(116.29,42.07) ; v1(118.078,84.828) 118.078,83.289 121.683,79.684 IC_Master.31 ; v1(119.19,120.93) 120.416,122.156 R_POW_LED.1 ; J?.4 133.945,104.02 v1(136.385,106.46) ; IC_Master.31@137.169,79.675 v1(139.4,79.675) ; IC_Master.10 v1(146.41,81.456) 146.41,79.352 148.525,77.238 ; v1(147.636,62.121) 143.905,65.852 143.905,68.429 IC_Master.61 143.91,70.66 145.434,72.184 150.141,72.184 ; v1(148.87,108.605) v1(157.184,100.291) 166.387,100.291 166.767,100.671 IC_LTC.12 166.767,112.872 168.119,114.224 171.277,114.224 172.652,112.849 Clt2.1 ; IC_Master.80 150.141,72.184 ; IC_Master.100 150.034,82.184 148.525,80.675 148.525,77.238 ; v1(153.55,56.207) 153.553,56.207 156.475,53.285 156.475,52.96 156.475,52.635 164.232,44.878 CON_FTDI_MCP.7 CON_FTDI_MCP.1 ; IC_LTC.9@168.292,101.951 IC_LTC.9 Clt2.1@172.643,101.976 ; 148.525,77.238 148.525,73.8 150.141,72.184
  Bottom Layer w0.25: v1(116.29,42.07) R_AUX+.2 v1(153.55,56.207) v1(147.636,62.121) ; v1(118.078,84.828) 118.078,88.164 124.164,94.25 124.164,101.776 J?.4 J?.3 119.19,109.25 v1(119.19,120.93) ; v1(136.385,106.46) 138.53,108.605 v1(148.87,108.605) ; v1(139.4,79.675) 144.629,79.675 v1(146.41,81.456) ; R_RST.2 v1(157.184,100.291)
+12: C_LDO1.2 CON_CC2.10 CON_IMD.4 CON_VS.1 CON_VS.4 CONN_CAN.1 F?.1@153.525,48 K?.1@154.926,121.92 K?.5@157.426,126.92 LDO.1 LDO.2 | length 239.7
  Top Layer w0.6: CON_VS.4 CON_VS.1 115.035,122.825 v2(117.431,125.221) ; CON_IMD.4 v2(147.572,54.278) ; F?.1@153.525,48 153.525,48.325 v2(147.572,54.278) ; K?.5@157.426,126.92 157.426,124.42 154.926,121.92 169.502,121.92 184.269,107.153 CONN_CAN.1 190.684,107.153 195.59,102.247 195.59,67.068 190.75,62.228 CON_CC2.10 185.853,61.593 183.578,59.318 172.773,59.318 170.533,57.078 150.372,57.078 v2(147.572,54.278)
  Bottom Layer w0.6: v2(117.431,125.221) 151.624,125.221 K?.1@154.926,121.92 ; C_LDO1.2 136.74,61.338 131.634,61.338 LDO.1 LDO.2 141.655,60.195 v2(147.572,54.278)
ACCUGND: CON_CC2.6 CON_IMD.5 | length 43.7
  Top Layer w0.25: CON_IMD.5 134.239,54.913 137.034,57.708 169.968,57.708 173.853,61.593 CON_CC2.6
AF: AMSF.2@184.398,120.97 CON_CC2.8 IC?.1 | length 79.2
  Top Layer w0.25: CON_CC2.8 179.853,65.792 184.398,70.337 v1(184.398,75.92)
  Bottom Layer w0.25: IC?.1 180.82,124.323 184.173,120.97 184.398,120.97 v1(184.398,75.92)
AIR+VE: CON_AIR.3 CON_CC1.3 | length 84.7
  Top Layer w0.25: CON_AIR.3 115.035,94.65 120.735,100.35 v1(126.95,100.35) ; v1(176.237,93.154) 179.718,89.673 CON_CC1.3
  Bottom Layer w0.25: v1(126.95,100.35) 137.081,110.481 150.684,110.481 156.695,104.47 160.405,104.47 163.475,101.4 163.475,95.233 165.553,93.154 v1(176.237,93.154)
AIR-VE: CON_AIR.5 CON_CC1.4 | length 76.7
  Top Layer w0.25: CON_AIR.5 v1(122.761,88.65) ; v1(143.515,98.49) v1(150.604,98.49) ; v1(179.776,92.615) 182.718,89.673 CON_CC1.4
  Bottom Layer w0.25: v1(122.761,88.65) 133.675,88.65 v1(143.515,98.49) ; v1(150.604,98.49) 158.877,98.49 164.753,92.615 v1(179.776,92.615)
AMS_FAULT: CON_CC2.2 IC_Master.18 | length 42.4
  Top Layer w0.25: IC_Master.18 142.41,79.665 145.197,76.878 v1(145.197,76.869) ; v1(168,76.869) 172.247,76.869 176.853,72.263 CON_CC2.2
  Bottom Layer w0.25: v1(145.197,76.869) v1(168,76.869)
AMS_RST: AMSF.5 CON_CC2.7 K?.3@188.084,116.92 K?.5@177.884,126.92 | length 119
  Top Layer w0.6: CON_CC2.7@176.867,62.242 v2(176.867,66.56) ; K?.5@177.884,126.92 181.688,126.92 188.084,120.524 K?.3@188.084,116.92
  Bottom Layer w0.6: AMSF.5 139.829,129.756 175.048,129.756 K?.5@177.884,126.92 ; v2(176.867,66.56) 188.084,77.777 K?.3@188.084,116.92
AMSLED: CON_CC2.5 K?.4@188.084,126.92 | length 63.3
  Top Layer w0.6: CON_CC2.5 189.809,71.628 193.815,75.634 v2(193.815,98.019)
  Bottom Layer w0.6: K?.4@188.084,126.92 193.815,121.189 v2(193.815,98.019)
ANAPIN1: ANA1.2 IC_Master.83 J?.7 | length 53.8
  Top Layer w0.25: J?.7 132.065,86.375 v1(132.065,82.087) ; v4(149.325,73.675) 149.329,73.679 152.656,73.679 IC_Master.83
  Bottom Layer w0.25: ANA1.2 112.045,98.98 114.505,96.52 J?.7 ; v1(132.065,82.087) 140.477,73.675 v4(149.325,73.675)
ANAPIN2: ANA2.2 IC_Master.84 J?.8 | length 55
  Top Layer w0.25: J?.8 121.925,94.02 131.22,84.725 v1(131.225,84.725) ; v1(150.55,74.175) 150.555,74.18 152.655,74.18 IC_Master.84
  Bottom Layer w0.25: ANA2.2 108.145,98.98 113.105,94.02 J?.8 ; v1(131.225,84.725) 141.775,74.175 v1(150.55,74.175)
AR_MISO: CON_FTDI_MCP.3 IC_LTC.3 IC_Master.22 | length 91.9
  Top Layer w0.25: v1(141.992,71.684) 140.41,73.266 IC_Master.22 140.41,87.485 141.74,88.815 160.845,88.815 165.767,93.737 IC_LTC.3 ; v1(145.2,66.425) v1(148.7,62.925) ; v1(174.214,57.555) 176.856,54.913 CON_FTDI_MCP.3
  Bottom Layer w0.25: v1(141.992,71.684) 145.2,68.476 v1(145.2,66.425) ; v1(148.7,62.925) 149.776,61.849 169.92,61.849 v1(174.214,57.555)
AR_MOSI: CON_FTDI_MCP.4 IC_LTC.2 IC_Master.21 | length 92.5
  Top Layer w0.25: v1(141.9,72.8) 140.91,73.79 IC_Master.21 140.91,86.935 142.3,88.325 144.543,88.325 144.568,88.3 v1(146.825,88.3) ; v1(146.175,66.425) v1(148.775,63.825) ; v1(160.568,89.451) 165.267,94.15 IC_LTC.2 ; v1(177.121,57.648) 179.856,54.913 CON_FTDI_MCP.4
  Bottom Layer w0.25: v1(141.9,72.8) 146.175,68.525 v1(146.175,66.425) ; v1(146.825,88.3) 159.417,88.3 v1(160.568,89.451) ; v1(148.775,63.825) 150.096,62.504 172.265,62.504 v1(177.121,57.648)
AR_RESET: C_RST2.1 C_RST.1 IC_Master.30 R_RST.1 RST_SWITCH.3 | length 51.6
  Top Layer w0.25: v1(133.45,83.825) 133.45,81.775 135.041,80.184 IC_Master.30
  Bottom Layer w0.25: v1(133.45,83.825) 139.575,89.95 146.025,89.95 148.732,92.657 148.732,102.822 RST_SWITCH.3 C_RST.1 152.491,102.191 155.66,102.191 158.829,102.191 C_RST2.1
AR_RXD0/TXUART: CON_FTDI_MCP.8 IC_Master.2 | length 59.8
  Top Layer w0.25: IC_Master.2 150.41,85.235 151.175,86 162.904,86 163.983,84.921 163.983,62.687 v1(165.659,61.011) ; CON_FTDI_MCP.8 v1(173.856,48.7)
  Bottom Layer w0.25: v1(165.659,61.011) 166.956,59.714 166.956,59.688 173.856,52.788 v1(173.856,48.7)
AR_SCK: CON_FTDI_MCP.5 IC_LTC.4 IC_Master.20 | length 95.5
  Top Layer w0.25: v1(143.75,71.875) 141.41,74.215 IC_Master.20 141.41,86.335 142.8,87.725 160.955,87.725 166.267,93.037 IC_LTC.4 ; v1(147.175,66.425) v1(150.4,63.2) ; v1(180.16,57.61) 182.856,54.913 CON_FTDI_MCP.5
  Bottom Layer w0.25: v1(143.75,71.875) 147.175,68.45 v1(147.175,66.425) ; v1(150.4,63.2) 174.569,63.2 v1(180.16,57.61)
AR_SS: IC_LTC.5 IC_Master.19 R_SS.1 | length 55.3
  Top Layer w0.25: IC_Master.19 141.91,85.785 143.15,87.025 161.428,87.025 166.767,92.364 IC_LTC.5 166.767,98.783 167.701,99.717 175.104,99.717 176.786,101.399 176.786,106.308 174.527,108.567 R_SS.1
AR_TXD0/RXUART: CON_FTDI_MCP.9 IC_Master.3 | length 62.6
  Top Layer w0.25: IC_Master.3 149.91,85.51 150.925,86.525 163.161,86.525 164.635,85.051 164.635,62.915 v1(166.863,60.687) ; CON_FTDI_MCP.9 v1(176.856,48.7)
  Bottom Layer w0.25: v1(166.863,60.687) 176.856,50.694 v1(176.856,48.7)
AREF: C_AREF.2 IC_Master.98 | length 9.3
  Top Layer w0.25: IC_Master.98 v1@158.58,81.184
  Bottom Layer w0.25: v1(158.58,81.191) 161.987,81.191 C_AREF.2
AUX+ve: CON_AIR.4 CON_CC1.5 | length 83.8
  Top Layer w0.25: CON_AIR.4 122.4,91.65 v1(127.225,86.825) ; v1(133.575,86.825) v1(135.85,84.55) ; v1(183.36,92.031) 185.718,89.673 CON_CC1.5
  Bottom Layer w0.25: v1(127.225,86.825) v1(133.575,86.825) ; v1(135.85,84.55) 141.7,84.55 155.012,97.862 158.087,97.862 163.918,92.031 v1(183.36,92.031)
AUX-ve: CON_AIR.6 CON_CC1.10 | length 89.3
  Top Layer w0.25: CON_AIR.6 114.4,79.375 127.955,65.82 v1(136.08,65.82) ; v1(182.3,75.582) 182.3,75.585 185.718,79.003 CON_CC1.10
  Bottom Layer w0.25: v1(136.08,65.82) 172.538,65.82 v1(182.3,75.582)
BLINK_LED: IC_Master.26 RLED.1 | length 41.4
  Top Layer w0.25: RLED.1 123.896,116.089 126.025,113.96 v1(126.025,107) ; v1(128.3,91.2) 130.85,88.65 133.8,88.65 137.16,85.29 IC_Master.26
  Bottom Layer w0.25: v1(126.025,107) 126.025,99.25 128.3,96.975 v1(128.3,91.2)
CANH: CONN_CAN.3 CONN_CAN.6 | length 9.4
  Top Layer w0.25: CONN_CAN.6 CONN_CAN.3
CANL: CONN_CAN.2 CONN_CAN.5 | length 9.4
  Top Layer w0.25: CONN_CAN.5 CONN_CAN.2
"CHRG AUX": CON_FTDI_MCP.12 IC_Master.72 R_AUX+.1 | length 60.8
  Top Layer w0.25: IC_Master.72 149.41,66.512 152.406,63.516 152.444,63.516 v1(155.45,60.51) ; v1(166,42.07) 183.683,42.07 185.856,44.243 CON_FTDI_MCP.12
  Bottom Layer w0.25: v1(155.45,60.51) R_AUX+.1 v1(166,42.07)
CSOUT: CON_CS.2 IC_Master.82 | length 67.3
  Top Layer w0.25: CON_CS.2 112.71,54.91 117.227,59.427 157.515,59.427 159.238,61.15 159.238,71.412 157.466,73.184 IC_Master.82
DIGIPIN1: DIG1.2 IC_Master.24 J?.5 | length 44.7
  Top Layer w0.25: J?.5 134.405,101.52 139.41,96.515 IC_Master.24
  Bottom Layer w0.25: DIG1.2 112.045,107.55 118.075,101.52 J?.5
DIGIPIN2: DIG2.2 IC_Master.25 J?.6 | length 48
  Top Layer w0.25: J?.6 136.23,99.02 138.91,96.34 IC_Master.25
  Bottom Layer w0.25: DIG2.2 108.145,107.55 116.675,99.02 J?.6
FTDI_DTR: C_RST2.2 CON_FTDI_MCP.10 | length 64.2
  Top Layer w0.25: v1(162.269,92.436) v1(162.269,96.901) ; v1@165.334,89.365 165.334,63.212 v1(167.21,61.336) ; v1(179.846,48.7) 179.846,44.888 CON_FTDI_MCP.10
  Bottom Layer w0.25: C_RST2.2 v1(162.269,96.901) ; v1(162.269,92.436) v1(165.334,89.371) ; v1(167.21,61.336) v1(179.846,48.7)
GND: AMSF.1@184.398,122.87 ANA1.1 ANA2.1 C_AREF.1 C_LDO1.1 C_LDO2.1 C_RST.2 C_tr1.2 C_tr2.2 C_XTAL1.1 C_XTAL2.2 Clt1.2 Clt2.2 CON_AIR.7 CON_AIR.8 CON_AIR.9 CON_AIR.10 CON_AIR.11 CON_AIR.12 CON_CC1.2 CON_CS.4 CON_FTDI_MCP.2 CON_FTDI_MCP.11 CON_IMD.3 CON_VS.5 CON_VS.6 CONN_CAN.4 DIG1.1 DIG2.1 IC?.3 IC_LTC.1 IC_LTC.7 IC_LTC.8 IC_LTC.13 IC_LTC.14 IC_Master.11 IC_Master.32 IC_Master.62 IC_Master.81 IC_Master.99 J?.1 J?.2 K?.1@175.384,121.92 LDO.3 LED_BLINK.1 POW_LED.1 R_IBIAS2.1 R_LDO2.1 RST_SWITCH.1
  other v1: 169.647,111.977
  other v3: 193.996,44.062 101.1,44.1 101.1,130.95 193.996,130.95
  other v4: 156.15,68.738
HVP_IN: AMSF.1@134.493,121.92 CON_HVP.1 | length 92.7
  Top Layer w0.6: CON_HVP.1 109.585,74.915 100.42,84.08 100.42,123.145 106.95,129.675 126.738,129.675 AMSF.1@134.493,121.92
HVP_OUT: CON_CC2.9 CON_HVP.2 | length 74.7
  Top Layer w0.6: CON_HVP.2 v2(122,64.88) ; v2(180.836,64.879) 182.853,62.863 CON_CC2.9
  Bottom Layer w0.6: v2(122,64.88) v2(180.836,64.879)
IBIAS: IC_LTC.16 R_IBIAS1.1 | length 4.3
  Top Layer w0.25: R_IBIAS1.1 163.367,103.939 164.767,102.538 IC_LTC.16
ICMP: IC_LTC.15 R_IBIAS1.2 R_IBIAS2.2 | length 6.8
  Top Layer w0.25: IC_LTC.15 R_IBIAS1.2 R_IBIAS2.2
IM: IC_LTC.10 R_IPIM.2 Transformer.4 | length 35.8
  Top Layer w0.25: Transformer.4 153.877,90.297 162.707,99.127 166.517,99.127 167.767,100.377 IC_LTC.10 167.767,105.582 170.752,108.567 R_IPIM.2
IM_CON: CON_ISOSPI.2 Transformer.3 | length 18.4
  Top Layer w0.25: Transformer.3 131.974,90.297 136.4,94.723 v1(136.4,98.075) ; CON_ISOSPI.2 136.4,101.983 v1(136.4,104.225)
  Bottom Layer w0.25: v1(136.4,98.075) v1(136.4,104.225)
IMD_FAULT: CON_CC2.3 CON_IMD.1 | length 59.3
  Top Layer w0.25: CON_IMD.1 CON_IMD.1 v1(156.967,44.879) ; v1(167.14,58.28) 179.853,70.993 CON_CC2.3
  Bottom Layer w0.25: v1(156.967,44.879) 162.618,44.879 167.14,49.401 v1(167.14,58.28)
IP: IC_LTC.11 R_IPIM.1 Transformer.6 | length 32.5
  Top Layer w0.25: Transformer.6 158.032,95.377 162.4,99.745 166.522,99.745 167.267,100.49 IC_LTC.11 167.267,106.982 168.852,108.567 R_IPIM.1
IP_CON: CON_ISOSPI.1 Transformer.1 | length 18.3
  Top Layer w0.25: Transformer.1 131.974,95.377 134.672,98.075 v1(134.675,98.075) ; CON_ISOSPI.1 136.4,111.379 v1(136.4,108.675)
  Bottom Layer w0.25: v1(134.675,98.075) 134.675,106.95 v1(136.4,108.675)
LVMS: CON_CC1.1 F?.2@156.475,48 | length 94.7
  Top Layer w0.6: F?.2@156.475,48 156.475,47.675 163.124,41.026 185.135,41.026 192.59,48.481 v2(192.59,58.972) ; CON_CC1.1 173.718,88.403 177.092,85.029 184.416,85.029 v2(192.59,76.855)
  Bottom Layer w0.6: v2(192.59,58.972) v2@192.59,76.628
MCP_SS: CON_FTDI_MCP.6 IC_Master.23 | length 69.3
  Top Layer w0.25: IC_Master.23 139.91,72.421 v1(141.197,71.134) ; v1(142.211,66.537) 148.792,59.956 v1(156.991,59.956) ; v1(160.659,56.288) 171.069,56.288 173.349,58.568 182.201,58.568 185.856,54.913 CON_FTDI_MCP.6
  Bottom Layer w0.25: v1(141.197,71.134) 142.211,70.12 v1(142.211,66.537) ; v1(156.991,59.956) v1(160.659,56.288)
MRHGND: CON_CC2.1 CON_IMD.6 | length 53.3
  Top Layer w0.25: CON_IMD.6 131.239,54.913 135.257,58.931 166.425,58.931 173.853,66.359 CON_CC2.1
NetAMSF_2: AMSF.2@136.993,116.92 K?.2@177.884,116.92 K?.3@167.626,116.92 | length 43.2
  Bottom Layer w0.6: AMSF.2@136.993,116.92 139.803,114.11 164.816,114.11 167.626,116.92 K?.2@177.884,116.92
NetC_tr1_1: C_tr1.1 Transformer.2 | length 15.7
  Top Layer w0.25: v1(127.162,92.837) Transformer.2
  Bottom Layer w0.25: C_tr1.1 120.3,88.746 124.391,92.837 v1(127.162,92.837)
NetC_tr2_1: C_tr2.1 Transformer.5 | length 27.5
  Top Layer w0.25: Transformer.5 145.842,92.85 v1(147.85,92.85)
  Bottom Layer w0.25: C_tr2.1 134.375,85.975 141.25,92.85 v1(147.85,92.85)
NetC_XTAL1_2: C_XTAL1.2 R_XTAL2.1 Y?.1 | length 12
  Bottom Layer w0.25: C_XTAL1.2 120.28,70.875 R_XTAL2.1 128.138,70.875 Y?.1
NetClt1_1: Clt1.1 IC_LTC.6 | length 8.4
  Top Layer w0.25: IC_LTC.6 167.267,95.922 168.197,94.992 170.077,94.992 Clt1.1
NetLDO_5: LDO.5 R_LDO1.1 R_LDO2.2 | length 8.9
  Bottom Layer w0.25: LDO.5 131.631,52.961 R_LDO2.2 R_LDO1.1
NetLED_BLINK_2: LED_BLINK.2 RLED.2 | length 5.1
  Top Layer w0.25: RLED.2 LED_BLINK.2
NetPOW_LED_2: POW_LED.2 R_POW_LED.2 | length 5.1
  Top Layer w0.25: R_POW_LED.2 POW_LED.2
PCR: CON_AIR.1 CON_CC1.7 | length 78.7
  Top Layer w0.25: CON_AIR.1 115.035,100.65 119.585,105.2 134.2,105.2 138.417,109.417 142.662,109.417 v1(155.96,96.119) ; v1(174.748,82.243) 176.718,80.273 CON_CC1.7
  Bottom Layer w0.25: v1(155.96,96.119) 165.018,87.061 169.93,87.061 v1(174.748,82.243)
PCR_AUX: CON_AIR.2 CON_CC1.6 | length 72.9
  Top Layer w0.25: CON_AIR.2 115.035,97.65 120.06,102.675 133.75,102.675 136.189,105.114 145.889,105.114 v1(154.584,96.419) ; v1(171.365,79.638) CON_CC1.6
  Bottom Layer w0.25: v1@154.594,96.409 v1(171.365,79.638)
SDC_IN: AMSF.3 CON_CC2.4 | length 64.4
  Top Layer w0.6: AMSF.3 147.193,106.264 v2(156.427,97.03) ; v2(179.76,75.356) 182.853,72.263 CON_CC2.4
  Bottom Layer w0.6: v2(156.427,97.03) 165.209,88.248 172.591,88.248 179.76,81.079 v2(179.76,75.356)
VS_BAT_IN: CON_CC1.9 CON_VS.2 | length 95
  Top Layer w0.25: CON_VS.2 149.876,119.825 156.484,113.217 v1(162.137,113.217) ; v1(171.456,94.054) 171.456,87.339 174.659,84.136 178.855,84.136 182.718,80.273 CON_CC1.9
  Bottom Layer w0.25: v1(162.137,113.217) 171.456,103.898 v1(171.456,94.054)
VS_HV_IN: CON_CC1.8 CON_VS.3 | length 92.5
  Top Layer w0.25: CON_VS.3 119.644,116.825 122.076,119.257 147.554,119.257 154.321,112.49 v1(160.936,112.49) ; v1(169.768,94.054) 169.768,87.675 173.974,83.469 176.522,83.469 179.718,80.273 CON_CC1.8
  Bottom Layer w0.25: v1(160.936,112.49) 169.768,103.658 v1(169.768,94.054)
XTAL1: IC_Master.34 R_XTAL2.2 R_XTAL.2 | length 16.5
  Top Layer w0.25: v1(129.175,76.75) 133.275,76.75 134.709,78.184 IC_Master.34
  Bottom Layer w0.25: R_XTAL2.2 R_XTAL.2 v1(129.175,76.75)
XTAL2: C_XTAL2.1 IC_Master.33 R_XTAL.1 Y?.2 | length 16.9
  Top Layer w0.25: v1(133.871,78.688) 133.873,78.686 137.158,78.686 IC_Master.33
  Bottom Layer w0.25: C_XTAL2.1 R_XTAL.1 125.231,78.681 Y?.2 133.864,78.681 v1(133.871,78.688)
XX: IC?.4 K?.2@157.426,116.92 | length 7.5
  Bottom Layer w0.6: K?.2@157.426,116.92 159.403,116.92 160.399,117.916 IC?.4
pads on no net: AMSF.4 CON_AIR.13 CON_AIR.14 CON_CC1.11 CON_CC1.12 CON_CC2.11 CON_CC2.12 CON_CS.1 CON_CS.5 CON_CS.6 CON_FTDI_MCP.13 CON_FTDI_MCP.14 CON_HVP.3 CON_HVP.4 CON_IMD.2 CON_IMD.7 CON_IMD.8 CON_ISOSPI.3 CON_ISOSPI.4 CON_VS.7 CON_VS.8 CONN_CAN.7 CONN_CAN.8 IC_Master.1 IC_Master.4 IC_Master.5 IC_Master.6 IC_Master.7 IC_Master.8 IC_Master.9 IC_Master.12 IC_Master.13 IC_Master.14 IC_Master.15 IC_Master.16 IC_Master.17 IC_Master.27 IC_Master.28 IC_Master.29 IC_Master.35 IC_Master.36 IC_Master.37 IC_Master.38 IC_Master.39 IC_Master.40 IC_Master.41 IC_Master.42 IC_Master.43 IC_Master.44 IC_Master.45 IC_Master.46 IC_Master.47 IC_Master.48 IC_Master.49 IC_Master.50 IC_Master.51 IC_Master.52 IC_Master.53 IC_Master.54 IC_Master.55 IC_Master.56 IC_Master.57 IC_Master.58 IC_Master.59 IC_Master.60 IC_Master.63 IC_Master.64 IC_Master.65 IC_Master.66 IC_Master.67 IC_Master.68 IC_Master.69 IC_Master.70 IC_Master.71 IC_Master.73 IC_Master.74 IC_Master.75 IC_Master.76 IC_Master.77 IC_Master.78 IC_Master.79 IC_Master.85 IC_Master.86 IC_Master.87 IC_Master.88 IC_Master.89 IC_Master.90 IC_Master.91 IC_Master.92 IC_Master.93 IC_Master.94 IC_Master.95 IC_Master.96 IC_Master.97 K?.4@167.626,126.92 RST_SWITCH.2 RST_SWITCH.4

## Polygon pours and split planes (outlines as drawn)
GND on Bottom Layer "GND_L02_P000" (solid, pour order 0): 97.332,134.83 197.607,134.83 197.607,40.33 97.332,40.33
GND on Top Layer "GND_L01_P001" (solid, pour order 1): 97.332,134.83 197.637,134.83 197.637,40.33 97.332,40.33

## Silkscreen, mask and mechanical layers (free items; w line width, h text height)
Top Overlay:
  lines w0.3: 194.34,58.34 195.34,58.34 ; 194.44,114.09 195.415,114.09 ; 194.89,58.79 195.34,58.34 ; 195.065,113.74 195.415,114.09 ; 195.34,88.84 195.34,58.34 ; 195.415,94.09 195.415,114.09 ; 195.74,113.765 195.415,114.09 ; 195.815,58.815 195.34,58.34 ; 195.34,58.34 195.34,58.34
  text "BMS MASTER 22-23" at 136.33,132.305 h1.52
  text "12V" at 101.729,122.529 h0.6
  text "12V" at 116.054,122.479 h0.6
  text "GND" at 101.579,119.504 h0.6
  text "VSB" at 116.104,119.504 h0.6
  text "VSH" at 116.079,116.579 h0.6
  text "GND" at 101.579,116.554 h0.6
  text "VS" at 101.371,112.429 h1.52 r90
  text "IP" at 137.529,111.179 h0.6
  text "GND" at 177.139,106.898 h0.6
  text "12V" at 191.814,106.898 h0.6
  text "ISOSPI" at 142.879,105.929 h1.52
  text "CANL" at 191.839,103.873 h0.6
  text "CANL" at 176.473,103.756 h0.6
  text "IM" at 137.529,101.579 h0.6
  text "CANH" at 176.457,100.809 h0.6
  text "CANH" at 191.839,100.798 h0.6
  text "P" at 116.129,100.254 h0.6
  text "PA" at 116.129,97.329 h0.6
  text "A+" at 116.104,94.404 h0.6
  text "CC4" at 194.644,93.486 h1.52 r270
  text "GND" at 102.621,92.379 h0.6 r90
  text "A+A" at 116.079,91.329 h0.6
  text "A+" at 180.044,90.882 h0.6 r90
  text "SUP" at 174.054,90.852 h0.6 r90
  text "GND" at 177.054,90.852 h0.6 r90
  text "A-" at 182.954,90.852 h0.6 r90
  text "A+A" at 185.994,90.822 h0.6 r90
  text "A-" at 116.104,88.404 h0.6
  text "A-A" at 116.129,85.279 h0.6
  text "AIR" at 101.396,85.104 h1.52 r90
  text "P" at 173.493,76.861 h0.6
  text "PA" at 176.18,76.855 h0.6
  text "A-A" at 184.921,76.832 h0.6
  text "VSH" at 178.91,76.798 h0.6
  text "VSB" at 181.916,76.786 h0.6
  text "HVPIN" at 108.354,75.854 h0.6
  text "MGND" at 172.783,73.867 h0.6
  text "AF" at 176.51,73.848 h0.6
  text "IF" at 179.497,73.838 h0.6
  text "SDCIN" at 181.467,73.838 h0.6
  text "ALED" at 184.782,73.848 h0.6
  text "HVP" at 101.446,67.629 h1.52 r90
  text "HVPOUT" at 107.979,62.354 h0.6
  text "ARST" at 175.937,59.481 h0.6
  text "AF" at 179.422,59.494 h0.6
  text "SDCOUT" at 181.12,59.488 h0.6
  text "12V" at 185.135,59.483 h0.6
  text "AGND" at 172.714,59.468 h0.6
  text "GND" at 173.098,56.493 h0.6
  text "CS" at 113.019,56.424 h0.6 r90
  text "5V" at 170.376,56.405 h0.6
  text "MISO" at 175.84,56.392 h0.6
  text "MOSI" at 178.883,56.376 h0.6
  text "SCK" at 182.126,56.325 h0.6
  text "12V" at 137.496,56.284 h0.6 r90
  text "SS" at 185.336,56.292 h0.6
  text "ACCUGND" at 134.486,56.264 h0.6 r90
  text "MRHGND" at 131.566,56.214 h0.6 r90
  text "5V" at 151.744,54.514 h0.6
  text "MCP" at 159.543,53.511 h1.52
  text "IMD" at 145.749,51.425 h1.52 r270
  text "12V" at 151.523,49.669 h0.6
  text "CS" at 101.597,49.587 h1.52 r90
  text "FTDI" at 158.511,44.068 h1.52
  text "IF" at 137.676,42.234 h0.6 r90
  text "5V" at 110.016,41.834 h0.6 r90
  text "RX" at 174.192,41.626 h0.6 r90
  text "TX" at 177.222,41.636 h0.6 r90
  text "5V" at 171.182,41.616 h0.6 r90
  text "GND" at 112.996,41.184 h0.6 r90
  text "GND" at 183.172,41.036 h0.6 r90
  text "DTR" at 180.192,41.026 h0.6 r90
  text "CAUX" at 186.152,40.406 h0.6 r90
  text "LVGND" at 131.516,40.314 h0.6 r90